# EAGLE board controller-ha-v4 (EAGLE 6.5.0)
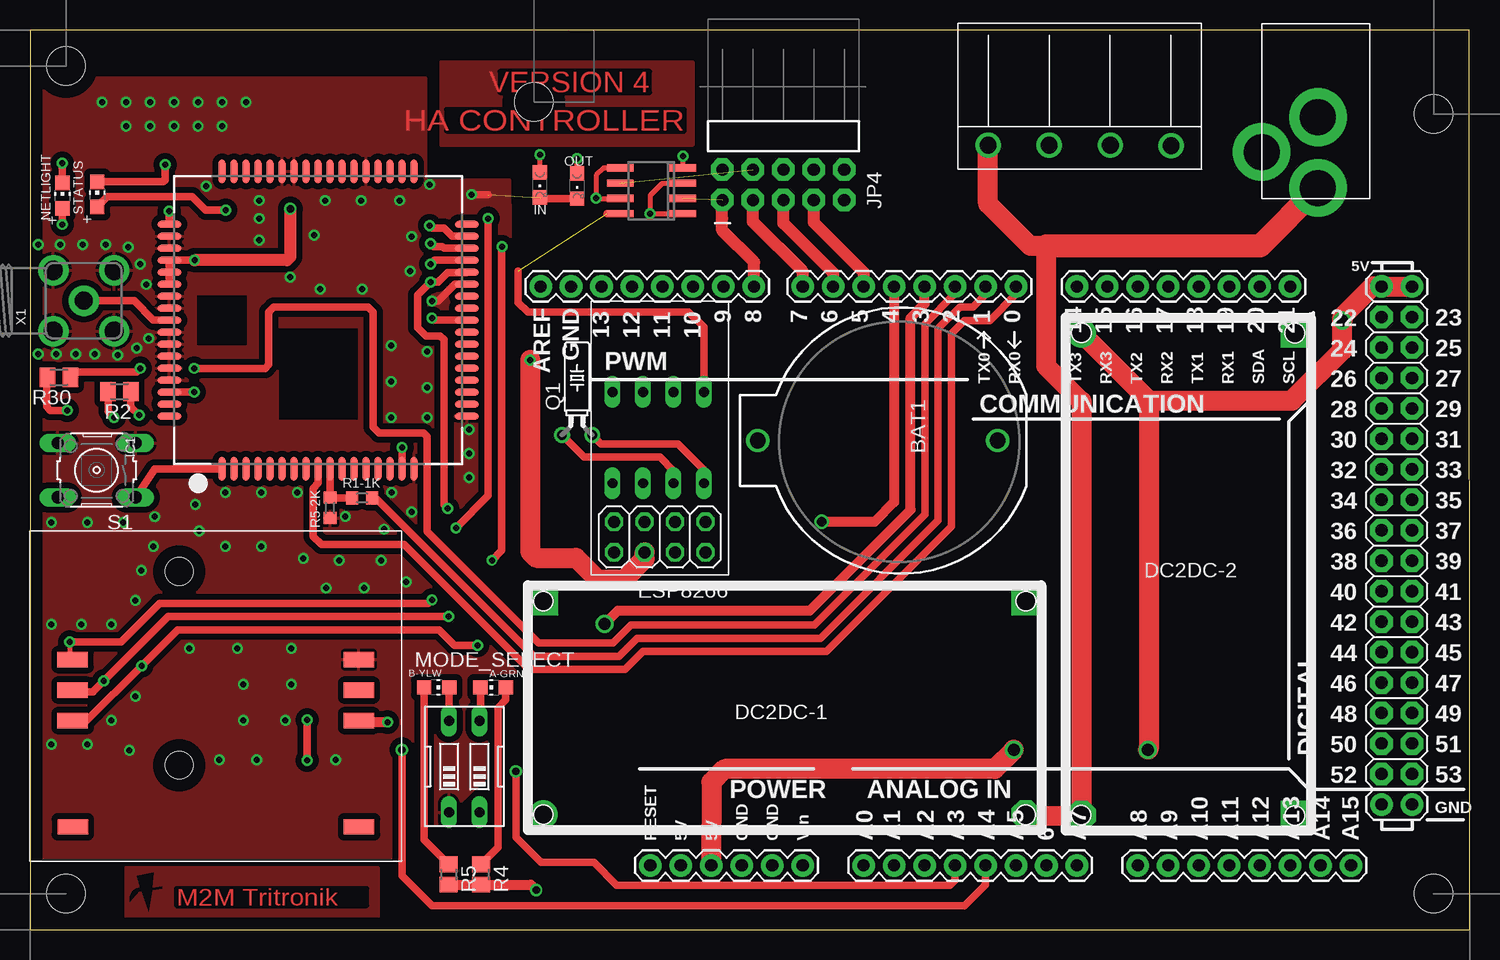
[diagram p0: board, top side]
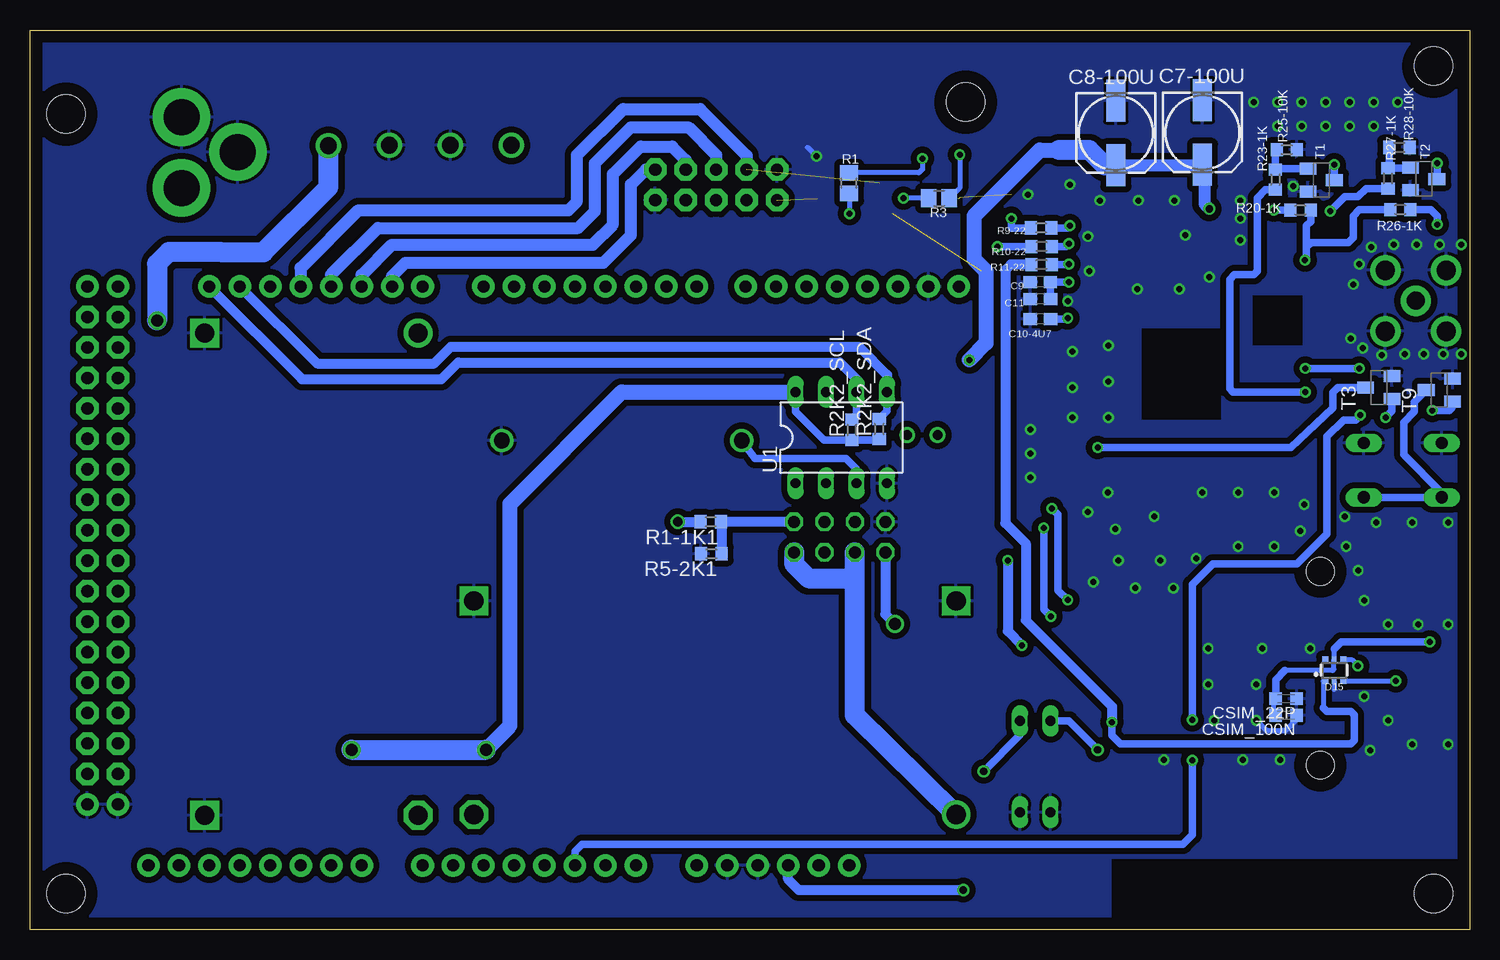
[diagram p1: board, bottom side, seen from below]

Size 120 x 75.01 mm. Coordinates in mm from the lower left corner, seen from the top.
Outline: 0,0 120,0 119.98,75.01 0,75 0,0
Copper layers (1*16): Top 0.035mm / dielectric 1.5mm / Bottom 0.035mm
Design rules "default": minimum track width 10mil, minimum drill 24mil, track to track 8mil, track to pad 8mil, pad to pad 8mil, via to via 8mil, smd to smd 8mil, copper to edge 40mil, drill to drill 8mil, minimum pad ring 10mil, minimum via ring 8mil, stop-mask expansion 4mil, vias tented up to drill 0mil, thermal gap 10mil
Net classes: 1 power: width 0.305 mm, drill 0.6 mm, clearance 0.813 mm; 2 GND: width 0.305 mm, drill 0.6 mm, clearance 0.508 mm; 3 LIVEAC: width 0.508 mm, drill 0.508 mm, clearance 1.27 mm
Holes 3.2 mm at 3,3 3,72 117,68 117,3 42,69

## Footprints (pad centres in the part's own frame; a part is rotated, then mirrored left to right if it is on the bottom)
4-PIN-CON-1759017 = drill 1.4: 1 -7.62,4.13; 2 -2.55,4.1; 3 2.55,4.1; 4 7.63,4.1
CHIP-LED0805 = smd 1.2 x 1.2: A 0,-1.05; C 0,1.05
ARDUINO_MEGA = drill 1.016 pad 1.88: 0 8.89,24.13; 1 6.35,24.13; 2 3.81,24.13; 3 1.27,24.13; 3.3V -19.05,-24.13; 4 -1.27,24.13; 5 -3.81,24.13; 5V@0 -16.51,-24.13; 5V@1 39.37,24.13; 5V@2 41.91,24.13; 6 -6.35,24.13; 7 -8.89,24.13; 8 -12.954,24.13; 9 -15.494,24.13; 10 -18.034,24.13; 11 -20.574,24.13; 12 -23.114,24.13; 13 -25.654,24.13; 14 13.97,24.13; 15 16.51,24.13; 16 19.05,24.13; 17 21.59,24.13; 18 24.13,24.13; 19 26.67,24.13; 20 29.21,24.13; 21 31.75,24.13; A0 -3.81,-24.13; A1 -1.27,-24.13; A2 1.27,-24.13; A3 3.81,-24.13; A4 6.35,-24.13; A5 8.89,-24.13; A6 11.43,-24.13; A7 13.97,-24.13; A8 19.05,-24.13; A9 21.59,-24.13; A10 24.13,-24.13; A11 26.67,-24.13; A12 29.21,-24.13; A13 31.75,-24.13; A14 34.29,-24.13; A15 36.83,-24.13; AREF -30.734,24.13; GND@0 -13.97,-24.13; GND@1 -11.43,-24.13; GND@2 39.37,-19.05; GND@3 41.91,-19.05; GND@4 -28.194,24.13; RESET -21.59,-24.13; VIN -8.89,-24.13 | drill 1.016 pad 1.88 octagon: 22 39.37,21.59; 23 41.91,21.59; 24 39.37,19.05; 25 41.91,19.05; 26 39.37,16.51; 27 41.91,16.51; 28 39.37,13.97; 29 41.91,13.97; 30 39.37,11.43; 31 41.91,11.43; 32 39.37,8.89; 33 41.91,8.89; 34 39.37,6.35; 35 41.91,6.35; 36 39.37,3.81; 37 41.91,3.81; 38 39.37,1.27; 39 41.91,1.27; 40 39.37,-1.27; 41 41.91,-1.27; 42 39.37,-3.81; 43 41.91,-3.81; 44 39.37,-6.35; 45 41.91,-6.35; 46 39.37,-8.89; 47 41.91,-8.89; 48 39.37,-11.43; 49 41.91,-11.43; 50 39.37,-13.97; 51 41.91,-13.97; 52 39.37,-16.51; 53 41.91,-16.51
BATTCOM_20MM_PTH = drill 1.3: 1 11.85,0; 2 -8.15,0
153CLV-0605 = smd 3.5 x 1.6: + 2.7,0; - -2.7,0
C0603 = smd 1.1 x 1: 1 -0.85,0; 2 0.85,0
C0603K = smd 1.05 x 1.08: 1 -0.875,0; 2 0.875,0
SOT363 = smd 0.5 x 0.5: 1 -0.75,-0.9; 3 0.75,-0.9; 4 0.75,0.9; 6 -0.75,0.9 | smd 0.4 x 0.5: 2 0,-0.9; 5 0,0.9
DCDCMODULE = drill 1.6 square: GND#0 -20.08,-8.82; GND#1 20.12,-8.82 | drill 1.6 octagon: VIN -20.08,8.98 | drill 1.6: VOUT 20.12,8.98
PJ-102A = drill 3 pad 4.8: RING 0.1,-3.39; RING_SW -4.6,-6.29; TIP 0.1,-9.29
ESP8266 = drill 1.016 octagon: CHPD 1.27,1.27; GND 3.81,-1.27; IO0 -1.27,-1.27; IO2 1.27,-1.27; RST -1.27,1.27; RXD -3.81,-1.27; TXD 3.81,1.27; VCC -3.81,1.27
SIM900_SMT = smd 2 x 0.6: P$1 -12.4,8; P$2 -12.4,7; P$3 -12.4,6; P$4 -12.4,5; P$5 -12.4,4; P$6 -12.4,3; P$7 -12.4,2; P$8 -12.4,1; P$9 -12.4,0; P$10 -12.4,-1; P$11 -12.4,-2; P$12 -12.4,-3; P$13 -12.4,-4; P$14 -12.4,-5; P$15 -12.4,-6; P$16 -12.4,-7; P$17 -12.4,-8; P$35 12.4,-8; P$36 12.4,-7; P$37 12.4,-6; P$38 12.4,-5; P$39 12.4,-4; P$40 12.4,-3; P$41 12.4,-2; P$42 12.4,-1; P$43 12.4,0; P$44 12.4,1; P$45 12.4,2; P$46 12.4,3; P$47 12.4,4; P$48 12.4,5; P$49 12.4,6; P$50 12.4,7; P$51 12.4,8 | smd 0.6 x 2: P$18 -8,-12.4; P$19 -7,-12.4; P$20 -6,-12.4; P$21 -5,-12.4; P$22 -4,-12.4; P$23 -3,-12.4; P$24 -2,-12.4; P$25 -1,-12.4; P$26 0,-12.4; P$27 1,-12.4; P$28 2,-12.4; P$29 3,-12.4; P$30 4,-12.4; P$31 5,-12.4; P$32 6,-12.4; P$33 7,-12.4; P$34 8,-12.4; P$52 8,12.4; P$53 7,12.4; P$54 6,12.4; P$55 5,12.4; P$56 4,12.4; P$57 3,12.4; P$58 2,12.4; P$59 1,12.4; P$60 0,12.4; P$61 -1,12.4; P$62 -2,12.4; P$63 -3,12.4; P$64 -4,12.4; P$65 -5,12.4; P$66 -6,12.4; P$67 -7,12.4; P$68 -8,12.4
SO08 = smd 0.6 x 2.2: 1 -1.905,-2.6; 2 -0.635,-2.6; 3 0.635,-2.6; 4 1.905,-2.6; 5 1.905,2.6; 6 0.635,2.6; 7 -0.635,2.6; 8 -1.905,2.6
CHIPLED_0805 = smd 1.2 x 1.2: A 0,-1.05; C 0,1.05
2X5-RA = drill 1.016 pad 1.88 octagon: 1 -1.27,5.08; 2 1.27,5.08; 3 -1.27,2.54; 4 1.27,2.54; 5 -1.27,0; 6 1.27,0; 7 -1.27,-2.54; 8 1.27,-2.54; 9 -1.27,-5.08; 10 1.27,-5.08
EDG-02 = drill 0.813 long: 1 -1.27,-3.81; 2 1.27,-3.81; 3 1.27,3.81; 4 -1.27,3.81
TC26H = drill 0.813: 1 -1.27,0; 2 1.27,0
R0805 = smd 1.3 x 1.5: 1 -0.85,0; 2 0.85,0
R0603 = smd 1 x 1.1: 1 -0.85,0; 2 0.85,0
M0805 = smd 1.3 x 1.6: 1 -0.95,0; 2 0.95,0
B3F-10XX = drill 1.016 long: 1 -3.251,2.261; 2 3.251,2.261; 3 -3.251,-2.261; 4 3.251,-2.261
SIM_HOLDER_PUSH = smd 2.54 x 1.27: 4 -11.804,-11.084; 8 12.066,-11.084; CLK -11.824,-2.214; GND 12.046,2.866; I/O 12.046,-2.214; RST -11.824,0.326; VCC -11.824,2.866; VPP 12.046,0.326 | hole 2.3: -2.924,10.216; -2.934,-5.934
SOT23-BEC = smd 1 x 1.4: B -0.95,-1.1; C 0,1.1; E 0.95,-1.1
DIL08 = drill 0.813 long: 1 -3.81,-3.81; 2 -1.27,-3.81; 3 1.27,-3.81; 4 3.81,-3.81; 5 3.81,3.81; 6 1.27,3.81; 7 -1.27,3.81; 8 -3.81,3.81
SMA90_DIP = drill 1.5 pad 2.54: ANTENNA 0,0 | drill 1.6 pad 2.54: GND1 -2.54,2.54; GND2 2.54,2.54; GND3 -2.54,-2.54; GND4 2.54,-2.54

## Placement (x,y rotation side)
4-WAY_L-TERMINAL  4-PIN-CON-1759017  [4-PIN-CON-1759017]  87.5,69.5 180 top
A-GRN  green  [CHIP-LED0805]  38.6,20.2 90 top
ARDUINO_FOOTPRINT  ARDUINO-MEGAFULL  [ARDUINO_MEGA]  73.3,29.49 0 top
B-YLW  yellow  [CHIP-LED0805]  33.9,20.2 270 top
BAT1  [BATTCOM_20MM_PTH]  72.52,40.78 180 top
C7-100U  100uF  [153CLV-0605]  22.26,66.47 270 bottom
C8-100U  100uF  [153CLV-0605]  29.48,66.43 270 bottom
C9  100nF  [C0603]  35.78,54.01 180 bottom
C10-4U7  4.7nF  [C0603]  35.77,50.91 180 bottom
C11  22pF  [C0603]  35.77,52.59 180 bottom
CSIM_22P  22pF  [C0603K]  15.29,19.26 180 bottom
CSIM_100N  100nF  [C0603K]  15.3,17.88 180 bottom
D15  [SOT363]  11.29,21.63 0 bottom
DC2DC-1  DCDCMODULE  [DCDCMODULE]  62.92,18.58 180 top
DC2DC-2  DCDCMODULE  [DCDCMODULE]  96.63,29.62 90 top
DC_JACKTHM  2.1MMJACKTHM  [PJ-102A]  107.27,71.13 0 top
ESP8266  ESP8266  [ESP8266]  52.5,32.73 180 top
IC1  [SIM900_SMT]  24.02,50.82 90 top
IC2  LM358MX  [SO08]  51.8,61.6 90 top
IN  green  [CHIPLED_0805]  42.5,62.1 180 top
JP4  [2X5-RA]  62.8,62.1 90 top
MODE_SELECT  [EDG-02]  36.2,13.6 0 top
NETLIGHT  green  [CHIP-LED0805]  2.7,61.2 0 top
OUT  green  [CHIPLED_0805]  45.6,62 180 top
Q1  [TC26H]  45.61,41.24 0 top
R1  220  [R0805]  51.72,62.24 90 bottom
R1-1K  1K  [R0603]  27.69,36 0 top
R1-1K1  1K  [R0603]  63.25,34.01 180 bottom
R2  120  [M0805]  7.46,44.86 180 top
R2K2_SCL  2.2K  [R0603]  51.49,41.67 90 bottom
R2K2_SDA  2.2K  [R0603]  49.21,41.74 90 bottom
R3  220  [R0805]  44.22,60.97 0 bottom
R4  1K  [R0805]  37.6,4.6 270 top
R5  1K  [R0805]  34.9,4.6 270 top
R5-2K  2K  [R0603]  25.01,35.17 90 top
R5-2K1  2K  [R0603]  63.2,31.34 0 bottom
R9-22  22  [R0603]  35.71,58.51 180 bottom
R10-22  22  [R0603]  35.67,56.96 180 bottom
R11-22  22  [R0603]  35.68,55.46 180 bottom
R20-1K  1K  [R0603]  14.1,59.99 0 bottom
R23-1K  1K  [R0603]  16.18,62.53 270 bottom
R25-10K  10K  [R0603]  15.23,65.02 0 bottom
R26-1K  1K  [R0603]  5.77,60.03 180 bottom
R27-1K  1K  [R0603]  6.8,62.64 270 bottom
R28-10K  10K  [R0603]  5.84,65.22 0 bottom
R30  120  [M0805]  2.41,46.05 180 top
S1  [B3F-10XX]  5.56,38.31 180 top
SIM_HOLDER  SIM_HOLDER_PUSH  [SIM_HOLDER_PUSH]  15.37,19.65 0 top
STATUS  yellow  [CHIP-LED0805]  5.6,61.3 0 top
T1  [SOT23-BEC]  12.36,62.49 270 bottom
T2  [SOT23-BEC]  3.82,62.59 270 bottom
T3  [SOT23-BEC]  7.56,45.2 90 bottom
T9  [SOT23-BEC]  2.51,45 90 bottom
U1  DS1307  [DIL08]  52.37,41.02 0 bottom
X1  [SMA90_DIP]  4.48,52.43 90 top

## Library data of the parts
4-WAY_L-TERMINAL SIM_HOLDER = maul
A-GRN B-YLW = led
ARDUINO_FOOTPRINT = SparkFun-Boards
BAT1 = SparkFun-Electromechanical
C7-100U C8-100U C9 C10-4U7 C11 CSIM_22P CSIM_100N R1-1K R1-1K1 R2K2_SCL R2K2_SDA R5-2K R5-2K1 R9-22 R10-22 R11-22 R20-1K R23-1K R25-10K R26-1K R27-1K R28-10K = rcl
D15 IC1 X1 = microbuilder
DC2DC-1 DC2DC-2 = bontor
DC_JACKTHM IN NETLIGHT OUT STATUS U1 = adafruit
ESP8266 = tigorcustom
IC2 = linear
JP4 = SparkFun-Connectors
MODE_SELECT = special
Q1 = crystal; OC_FARNELL: unknown; OC_NEWARK: unknown
R1-R5 R30 = resistor
S1 = switch-omron; MPN: B3F-1000; OC_FARNELL: 176432; OC_NEWARK: 36M3542
T1 T2 = transistor
T3 T9 = transistor-neu-to92

## Nets
+3V3 [power]: C7-100U.+ C8-100U.+ DC2DC-1.VOUT ESP8266.CHPD ESP8266.VCC IC1.P$55 IC1.P$56 IC1.P$57 R20-1K.2 R26-1K.2
+12V [power]: 4-WAY_L-TERMINAL.4 DC2DC-1.VIN DC2DC-2.VIN DC_JACKTHM.TIP
CE: ARDUINO_FOOTPRINT.6 JP4.5
CLK: ARDUINO_FOOTPRINT.7 JP4.3
CTRL_SIMRESET: ARDUINO_FOOTPRINT.A2 R2.1
ESP_RX: ESP8266.RXD R1-1K1.1 R5-2K1.2
ESP_RXX: ARDUINO_FOOTPRINT.4 R1-1K1.2
ESP_TX: ARDUINO_FOOTPRINT.3 ESP8266.TXD
GND [GND]: 4-WAY_L-TERMINAL.2 4-WAY_L-TERMINAL.3 ARDUINO_FOOTPRINT.GND@0 ARDUINO_FOOTPRINT.GND@1 ARDUINO_FOOTPRINT.GND@2 ARDUINO_FOOTPRINT.GND@3 ARDUINO_FOOTPRINT.GND@4 BAT1.2 C7-100U.- C8-100U.- C9.2 C10-4U7.2 C11.2 CSIM_22P.1 CSIM_100N.1 D15.2 DC2DC-1.GND#0 DC2DC-1.GND#1 DC2DC-2.GND#0 DC2DC-2.GND#1 DC_JACKTHM.RING DC_JACKTHM.RING_SW ESP8266.GND IC1.P$17 IC1.P$18 IC1.P$29 IC1.P$39 IC1.P$45 IC1.P$46 IC1.P$53 IC1.P$54 IC1.P$58 IC1.P$59 IC1.P$61 IC1.P$62 IC1.P$63 IC1.P$64 IC1.P$65 IC2.4 IN.C JP4.2 JP4.9 MODE_SELECT.1 MODE_SELECT.2 OUT.C R5-2K1.1 R5-2K.1 R25-10K.2 R28-10K.2 S1.3 S1.4 SIM_HOLDER.GND T1.E T2.E T3.E T9.E U1.4 X1.GND1 X1.GND2 X1.GND3 X1.GND4
GPIO11: IC1.P$67
GPIO12: IC1.P$68
N$1: ARDUINO_FOOTPRINT.1 R1-1K.2
N$2: IC1.P$31 R11-22.1
N$3: IC1.P$32 R10-22.1
N$4: IC1.P$33 R9-22.1
N$5: C10-4U7.1 IC1.P$26
N$6: IC1.P$60 X1.ANTENNA
N$8: R20-1K.1 STATUS.A
N$9: STATUS.C T1.C
N$10: R23-1K.1 R25-10K.1 T1.B
N$11: NETLIGHT.A R26-1K.1
N$12: NETLIGHT.C T2.C
N$13: R27-1K.1 R28-10K.1 T2.B
N$14: R30.2 T9.B
N$15: R2.2 T3.B
N$16: Q1.1 U1.2
N$19: Q1.2 U1.1
N$21: IC2.1 IC2.3 R1.1
N$23: BAT1.1 U1.3
N$24: IC2.5 IC2.7 R3.1
N$25: OUT.A R1.2
N$26: IN.A R3.2
N$27: A-GRN.A R4.1
N$28: B-YLW.A R5.1
PL: ARDUINO_FOOTPRINT.5 JP4.7
PWRKEY: ARDUINO_FOOTPRINT.2 R30.1
Q7: ARDUINO_FOOTPRINT.8 IC2.2 JP4.1
SCL: ARDUINO_FOOTPRINT.21 R2K2_SCL.2 U1.6
SDA: ARDUINO_FOOTPRINT.20 R2K2_SDA.2 U1.5
SHCP: ARDUINO_FOOTPRINT.16 JP4.8
SIM_NETLIGHT: IC1.P$52 R27-1K.2
SIM_PWRKEY: IC1.P$1 S1.1 S1.2 T9.C
SIM_RESET: IC1.P$16 T3.C
SIM_RX: IC1.P$10 R1-1K.1 R5-2K.2
SIM_STATUS: IC1.P$66 R23-1K.2
SIM_TX: ARDUINO_FOOTPRINT.0 IC1.P$9
SR_DS: ARDUINO_FOOTPRINT.18 IC2.6 JP4.4
SR_RST: ARDUINO_FOOTPRINT.15 JP4.10
STATE_A: A-GRN.C ARDUINO_FOOTPRINT.A3 MODE_SELECT.3
STATE_B: ARDUINO_FOOTPRINT.A4 B-YLW.C MODE_SELECT.4
STCP: ARDUINO_FOOTPRINT.17 JP4.6
USIM_CLK: D15.4 R10-22.2 SIM_HOLDER.CLK
USIM_DATA: D15.1 R11-22.2 SIM_HOLDER.I/O
USIM_RESET: D15.3 R9-22.2 SIM_HOLDER.RST
USIM_VCC: C9.1 C11.1 CSIM_22P.2 CSIM_100N.2 D15.5 IC1.P$30 SIM_HOLDER.VCC
VCC [power]: 4-WAY_L-TERMINAL.1 ARDUINO_FOOTPRINT.5V@0 ARDUINO_FOOTPRINT.5V@1 ARDUINO_FOOTPRINT.5V@2 DC2DC-2.VOUT IC2.8 R2K2_SCL.1 R2K2_SDA.1 R4.2 R5.2 U1.8
VIN: ARDUINO_FOOTPRINT.VIN

## Tracks (layer width: path | path; a pad name or v marks a point on that pad's centre or on a via)
+3V3  (via drill 0.5, 0.6)
  Top 0.61: v13.71,55.82 IC1.P$55 IC1.P$56 | IC1.P$56 11.6,54.8 | IC1.P$56 IC1.P$57
  Top 1.016: v21.7,60.1 21.7,56.1 21.42,55.82 v13.71,55.82
  Top 1.676: v41.7,47.5 41.7,31.5 42.2,31 45.5,31 47.3,29.2 49.5,29.2 51.23,30.93 ESP8266.CHPD
  Bottom 0.61: R26-1K.2 9.17,60.03 9.7,59.5 9.7,57.7 10.1,57.3 13.2,57.3 13.6,56.9 | 13.6,56.9 13.6,55.93 v13.71,55.82 | C7-100U.+ 22.17,63.77 22.1,63.7 | R20-1K.2 13.25,59.05 13.6,58.7 13.6,56.9
  Bottom 1.016: C8-100U.+ 22.3,63.73 C7-100U.+ | 22.1,63.7 22.1,60.5 v21.7,60.1
  Bottom 1.27: v41.7,47.5 40.3,48.9 40.3,54.9 41.3,55.9 41.3,59.5 35.83,65.01 34.2,64.99
  Bottom 1.676: DC2DC-1.VOUT 51.23,17.89 51.23,29.3 | 51.23,29.3 ESP8266.CHPD | ESP8266.VCC 56.31,30.51 55.1,29.3 51.23,29.3 | C8-100U.+ 30.43,63.73 31.7,65 34.2,64.99
+12V
  Top 1.676: DC2DC-1.VIN 83.2,9.5 DC2DC-2.VIN 87.66,44.05 84.7,47.01 84.7,57 83.4,57 79.87,60.53 4-WAY_L-TERMINAL.4
  Top 1.93: DC_JACKTHM.TIP 102.56,57.01 84.7,57
CE
  Top 1.016: ARDUINO_FOOTPRINT.6 66.96,54.74 62.8,58.9 JP4.5
CLK
  Top 1.016: ARDUINO_FOOTPRINT.7 64.42,54.85 60.26,59.01 JP4.3
CTRL_SIMRESET  (via drill 0.5)
  Top 0.61: R2.1 8.41,43.59 v9.1,42.9 | v23.1,17.5 v23.1,14.1
  Bottom 0.61: v9.1,42.9 9.5,42.5 10.5,42.5 11.9,41.1 11.9,33 14.4,30.5 21.4,30.5 23.1,28.8 v23.1,17.5 | ARDUINO_FOOTPRINT.A2 74.58,6.52 74,7.1 23.9,7.1 23.1,7.9 v23.1,14.1
ESP_RX
  Bottom 0.813: ESP8266.RXD R1-1K1.1 62.35,33.96 R5-2K1.2
ESP_RXX  (via drill 0.8)
  Top 0.813: ARDUINO_FOOTPRINT.4 72.04,35.64 70.4,34 v66,34
  Bottom 0.813: v66,34 R1-1K1.2
ESP_TX  (via drill 1)
  Top 0.813: v47.9,25.5 49,26.6 65,26.6 73.4,35 73.4,51 74.58,52.18 ARDUINO_FOOTPRINT.3
  Bottom 0.813: ESP8266.TXD 48.69,26.29 v47.9,25.5
GND  (via drill 0.5)  (2 unrouted)
  Top 0.406: IC2.4 54.45,63.55 v54.45,64.5
  Top 0.61: IC1.P$29 35.42,53.82 34,52.4 v33.5,52.4 | 38.2,61.3 v36.8,61.3 | 42.6,60.95 OUT.C
  Bottom 0.406: D15.2 11.29,20.01 | v17.79,17.45 16.94,16.6 15.31,16.6 14.43,17.48 CSIM_100N.1 | v54.45,64.5 55.15,65.2 55.2,65.2
  other vias: 0.7,48 2.2,48 3.8,48 5.4,48 8.9,48.5 7.3,47.9 9.9,49.3 9.7,53.8 9.2,55.5 8.2,56.9 6.3,57.1 4.4,57.1 2.5,57.1 0.7,57.1 6,69 8,69 10,69 12,69 14,69 16,69 18,69 8,67 10,67 12,67 14,67 16,67 19.1,60.8 19.1,59.3 19.1,57.5 24.6,60.8 27.6,60.8 23.7,57.9 31.7,54.9 33.1,42.7 30.1,45.7 27.7,53.4 24.2,53.4 31.8,57.8 14.7,62 36.6,41.7 36.6,39.7 36.6,37.7 21.7,54.4 30.8,60.8 33.3,62.13 30.1,42.7 30.1,48.7 33.1,48.2 33.1,45.2 31.8,34.82 26.29,34.45 29.51,33.39 30.14,36.46 13.79,35.45 14.09,33.25 16.29,31.95 19.29,31.95 16.29,36.45 19.29,36.45 22.29,36.45 22.79,30.95 25.76,30.79 29.26,30.79 31.36,28.99 27.84,28.49 24.69,28.47 10.41,34.43 1.79,25.45 4.29,25.45 6.79,25.45 8.79,27.45 10.29,31.95 9.29,29.95 1.79,33.95 4.79,33.95 7.79,33.95 1.79,15.45 6.79,17.45 13.29,23.45 17.29,23.45 21.79,23.45 21.29,17.45 17.79,20.45 21.79,20.45 4.79,15.45 8.79,19.45 8.29,14.95 15.79,14.15 18.89,14.15 25.49,14.15
  pour Top: 33,62.5 33,71 0,71 0,6 31,6 40.5,15 40,62.5
  pour Bottom: 0,6 30,6 30,0 120,0 120.01,75.03 0.04,75
GNDA
  cutout Top: 20.75,42.55 20.75,50.1 27.3,50.1 27.3,42.55
  cutout Top: 13.95,48.75 13.95,52.85 18.05,52.85 18.05,48.75
  cutout Bottom: 13.95,48.75 13.95,52.85 18.05,52.85 18.05,48.75
  cutout Bottom: 20.75,42.55 27.3,42.55 27.3,50.1 20.75,50.1
N$1
  Top 0.61: ARDUINO_FOOTPRINT.1 79.66,52.96 78.6,51.9 77.5,51.9 75.7,50.1 75.7,34.1 65.9,24.3 50.6,24.3 49.1,22.8 42,22.8 28.8,36 R1-1K.2
N$2  (via drill 0.5)
  Top 0.61: v33.4,55.5 33.72,55.82 IC1.P$31
  Bottom 0.61: R11-22.1 33.44,55.46 v33.4,55.5
N$3  (via drill 0.5)
  Top 0.61: v33.4,57.2 33.64,56.96 34.36,56.96 34.5,56.82 IC1.P$32
  Bottom 0.61: R10-22.1 33.64,56.96 v33.4,57.2
N$4  (via drill 0.5)
  Top 0.61: v33.3,58.7 33.5,58.5 34.5,58.5 35.18,57.82 IC1.P$33
  Bottom 0.61: R9-22.1 33.49,58.51 v33.3,58.7
N$5  (via drill 0.5)
  Top 0.61: v33.5,51 33.68,50.82 IC1.P$26
  Bottom 0.61: C10-4U7.1 33.59,50.91 v33.5,51
N$6
  Top 0.61: X1.ANTENNA 8.67,52.43 10.28,50.82 IC1.P$60
N$8  (via drill 0.5)
  Top 0.61: STATUS.A 6.45,61.1 13.54,61.1 14.65,59.99 v16.29,59.99 v16.3,60
  Bottom 0.61: v16.3,60 15.36,60 R20-1K.1
N$9  (via drill 0.5)
  Top 0.61: STATUS.C 11.12,62.35 T1.C v11.26,63.78
  Bottom 0.61: v11.26,63.78 T1.C
N$10
  Bottom 0.61: R25-10K.1 16.18,64.92 R23-1K.1 16.12,63.44 T1.B
N$11  (via drill 0.5)
  Top 0.61: NETLIGHT.A v2.7,58.8
  Bottom 0.61: v2.7,58.8 2.7,59.5 3.23,60.03 R26-1K.1
N$12  (via drill 0.5)
  Top 0.61: v2.7,63.9 NETLIGHT.C
  Bottom 0.61: T2.C 2.7,62.61 v2.7,63.9
N$13
  Bottom 0.61: T2.B 4.97,63.49 R27-1K.1 6.69,63.6 R28-10K.1
N$14  (via drill 0.5)
  Top 0.61: v3.1,43.3 1.7,43.3 1.4,43.6 1.4,45.99 R30.2
  Bottom 0.61: T9.B 1.45,44.05 1.5,44 1.5,43.5 1.7,43.3 v3.1,43.3
N$15  (via drill 0.5)
  Top 0.61: R2.2 6.51,43.19 v7,42.7
  Bottom 0.61: v7,42.7 6.46,43.24 T3.B
N$16
  Top 0.61: Q1.1 46.18,39.4 52.5,39.4 53.64,38.26 U1.2
N$18
  pour Top: 8,5.2 29,5.2 29,-0.1 8,-0.1
N$19
  Top 0.61: Q1.2 47.62,40.5 54,40.5 56.18,38.32 U1.1
N$21  (via drill 0.5)
  Top 0.406: IC2.1 v51.7,59.7 51.7,61.2 52.7,62.2 54.37,62.2 IC2.3
  Bottom 0.406: R1.1 51.7,61.37 v51.7,59.7
N$22
  pour Top: 55.25,65.37 34.25,65.37 34.25,72.37 55.25,72.37
N$23
  Bottom 0.61: U1.3 51.1,38.4 52,39.3 59.55,39.3 BAT1.1
N$24  (via drill 0.5)
  Top 0.406: IC2.7 47.23,60.97 v47.2,61 47.2,62.9 47.8,63.51 IC2.5
  Bottom 0.406: R3.1 45.1,61 v47.2,61
N$25  (via drill 0.5)
  Top 0.406: OUT.A v45.6,64.3
  Bottom 0.406: v45.6,64.3 45.6,63.4 45.9,63.1 R1.2
N$26  (via drill 0.5)
  Top 0.406: IN.A v42.5,64.6
  Bottom 0.406: v42.5,64.6 42.5,61.84 R3.2
N$27
  Top 0.61: A-GRN.A 39.65,19.15 39,18.5 39,6.85 R4.1
N$28
  Top 0.61: B-YLW.A 32.85,7.5 R5.1
PL
  Top 1.016: ARDUINO_FOOTPRINT.5 69.5,54.8 65.34,58.96 JP4.7
PWRKEY  (via drill 0.5)
  Top 0.61: R30.1 3.81,46.5 8.9,46.5 v9.2,46.8 | v13.7,46.8 19.6,46.8 19.9,47.1 19.9,51.5 20.3,51.9 28.2,51.9 28.6,51.5 28.6,41.9 29.1,41.4 32.8,41.4 33.1,41.1 33.1,33.2 42.4,23.9 48.6,23.9 50.1,25.4 65.4,25.4 74.6,34.6 74.6,50.5 77.12,53.02 ARDUINO_FOOTPRINT.2
  Bottom 0.61: v9.2,46.8 v13.7,46.8
Q7  (1 unrouted)
  Top 1.016: ARDUINO_FOOTPRINT.8 60.36,55.64 57.7,58.3 57.7,59.31 JP4.1
SCL
  Bottom 0.61: R2K2_SCL.2 51.1,42.91 U1.6
  Bottom 0.813: ARDUINO_FOOTPRINT.21 97.32,45.9 85.7,45.9 84.3,47.3 52.5,47.3 51.1,45.9 U1.6
SDA
  Bottom 0.61: R2K2_SDA.2 48.56,43.24 48.56,44.3 U1.5
  Bottom 0.813: ARDUINO_FOOTPRINT.20 96.08,47.2 86.3,47.2 84.9,48.6 50.9,48.6 48.56,46.26 48.56,44.3
SHCP
  Bottom 1.016: JP4.8 65.34,64.17 66.47,65.3 69.1,65.3 71.4,63 71.4,58.8 73.1,57.1 89.84,57.1 92.36,54.58 ARDUINO_FOOTPRINT.16
SIM_NETLIGHT  (via drill 0.5)
  Top 0.61: IC1.P$52 11.62,59.88 v11.6,59.9
  Bottom 0.61: v11.6,59.9 10.4,61.1 9.3,61.1 8.61,61.79 R27-1K.2
SIM_PWRKEY
  Top 0.61: IC1.P$1 10.38,38.42 S1.1
  Bottom 0.61: T9.C 4.6,44.01 4.6,43.2 5.5,42.3 5.5,39.6 2.31,36.41 S1.2 S1.1
SIM_RESET  (via drill 0.5)
  Top 0.61: v31,40.2 31,38.44 IC1.P$16
  Bottom 0.61: T3.C 11,45.2 11.4,44.8 11.4,43.5 14.9,40.2 v31,40.2
SIM_RX
  Top 0.61: IC1.P$10 R5-2K.2 25.01,35.99 25,36 R1-1K.1
SIM_STATUS  (via drill 0.5)
  Top 0.61: v13.69,44.82 IC1.P$66
  Bottom 0.61: R23-1K.2 17.02,61.68 17.7,61 17.7,54.9 18,54.6 19.6,54.6 20,54.2 20,45.1 19.72,44.82 v13.69,44.82
SIM_TX
  Top 0.61: ARDUINO_FOOTPRINT.0 82.2,53 80,50.8 77.9,50.8 76.8,49.7 76.8,33.6 66.4,23.2 51.1,23.2 49.6,21.7 41.6,21.7 31.2,32.1 24.3,32.1 23.6,32.8 23.6,36.8 24.02,37.22 IC1.P$9
SR_DS  (1 unrouted)
  Bottom 1.016: JP4.4 60.26,64.54 64.13,68.41 70.56,68.41 70.67,68.3 70.7,68.3 74.4,64.6 74.4,60.7 75.12,59.97 92.63,59.97 97.44,55.16 ARDUINO_FOOTPRINT.18
SR_RST
  Bottom 1.016: JP4.10 68.65,63.37 69.9,62.12 69.9,57.9 72.2,55.6 88.7,55.6 89.82,54.48 ARDUINO_FOOTPRINT.15
STATE_A  (via drill 0.6)
  Top 0.61: ARDUINO_FOOTPRINT.A3 77.12,4.12 76.7,3.7 48.9,3.7 47,5.6 42.6,5.6 40.5,7.7 v40.5,13.2 | A-GRN.C 37.55,17.49 MODE_SELECT.3
  Bottom 0.61: MODE_SELECT.3 37.47,16.23 v40.5,13.2
STATE_B  (via drill 0.6)
  Top 0.61: ARDUINO_FOOTPRINT.A4 79.66,3.76 77.9,2 33.5,2 31,4.5 v31,15 | B-YLW.C 34.95,17.43 MODE_SELECT.4
  Bottom 0.61: MODE_SELECT.4 33.41,17.41 v31,15
STCP
  Bottom 1.016: JP4.6 62.8,64.59 65.11,66.9 69.9,66.9 72.9,63.9 72.9,59.9 74.3,58.5 91,58.5 94.9,54.6 ARDUINO_FOOTPRINT.17
TRITRONIK
  cutout Top: 10.3,4.8 8.9,4.5 9.2,3.5 arc90 8.3,2.6 8.3,2.3 9.1,3.2 9.3,3.2 9.9,1.5 10.2,3.3 11,3.4 11,3.6 10.2,3.5
USIM_CLK  (via drill 0.5)
  Top 0.61: v39.34,56.96 39.3,56.92 39.3,31.6 v38.5,30.8 | v37.3,23.7 35.4,23.7 34.1,25 12.3,25 v9.3,22 4.65,17.35 SIM_HOLDER.CLK
  Bottom 0.406: 10.5,22.5 D15.4 9.83,22.53 v9.3,22
  Bottom 0.61: R10-22.2 v39.34,56.96
  Bottom 0.813: v38.5,30.8 38.5,24.9 v37.3,23.7
USIM_DATA  (via drill 0.5)
  Top 0.813: v29.8,17.3 27.12,17.3 SIM_HOLDER.I/O
  Bottom 0.406: D15.1 12.17,20.73 12.2,20.7 12.2,18.5
  Bottom 0.61: v29.8,17.3 29.8,16.2 29.1,15.5 9.9,15.5 9.6,15.8 9.6,17.9 9.9,18.2 11.9,18.2 12.2,18.5
  Bottom 0.813: R11-22.2 38.24,55.46 38.7,55 38.7,33.9 37,32.2 37,25.8 29.8,18.6 v29.8,17.3
USIM_RESET  (via drill 0.5)
  Top 0.61: v38.2,59.3 38.2,36.2 v35.5,33.5 | v34.9,26.1 11.51,26.1 v6.14,20.73 5.25,19.85 5.25,19.84 3.25,19.84 SIM_HOLDER.RST
  Bottom 0.406: D15.3 v6.14,20.73
  Bottom 0.61: R9-22.2 38.19,58.51 38.2,58.5 v38.2,59.3 | v35.5,33.5 35.5,26.7 v34.9,26.1
USIM_VCC  (via drill 0.5)
  Top 0.406: v3.3,24 3.3,22.43 SIM_HOLDER.VCC
  Top 0.61: IC1.P$30 36.4,54.8 34.8,54.8 34,54 v33.4,54 32.3,52.9 32.3,50.2 33,49.5 34.2,49.5 34.5,49.2 34.5,35.4 v34.8,35.1 | v3.3,24 7.6,24 10.8,27.2 33.2,27.2 v33.5,27.5
  Bottom 0.406: 11.29,23.41 D15.5 11.3,21.7 11.4,21.6 15.4,21.6 | CSIM_100N.2 16.28,17.88 16.3,17.9 16.3,19.12 CSIM_22P.2 | CSIM_22P.2 16.16,19.23 16.2,19.2 | CSIM_22P.2
  Bottom 0.61: v33.4,54 v33.41,54.01 C9.1 C11.1 | v33.5,27.5 34.3,28.3 34.3,34.6 v34.8,35.1 | CSIM_22P.2 16.16,20.84 15.4,21.6 | v3.3,24 10.7,24 11.29,23.41
VCC  (via drill 0.6, 1)  (1 unrouted)
  Top 0.61: 40.7,54.9 40.7,52.3 41.5,51.5 54.9,51.5 56.18,50.22 U1.8 | 48.09,59.7 IC2.8
  Top 0.813: R5.2 R4.2 41.75,3.75 v42.2,3.3
  Top 1.676: v82,15 80.4,13.4 57.9,13.4 56.8,12.3 ARDUINO_FOOTPRINT.5V@0 | DC2DC-2.VOUT 93.26,44.1 | 93.26,44.1 105.2,44.1 109.4,48.3 v109.4,50.8 109.4,51.1 111.94,53.64 ARDUINO_FOOTPRINT.5V@1 ARDUINO_FOOTPRINT.5V@2 | 93.26,44.1 93.26,15.06 v93.2,15
  Bottom 0.61: R2K2_SDA.1 49.28,40.82 R2K2_SCL.1 53.82,40.82 56.2,43.2 56.2,44.81 U1.8
  Bottom 0.813: v42.2,3.3 55.9,3.3 56.8,4.2 ARDUINO_FOOTPRINT.5V@0
  Bottom 1.27: v82,15 80,17 80,35.5 70.67,44.83 U1.8
  Bottom 1.676: v109.4,50.8 109.4,55.5 109.3,55.6 108.42,56.49 104,56.48 100.56,56.48 95.12,61.92 4-WAY_L-TERMINAL.1 | v93.2,15 v82,15

## Text on the board
Top: VERSION 4 | HA CONTROLLER | M2M Tritronik